# EAGLE board adc module (EAGLE 6.5.0)
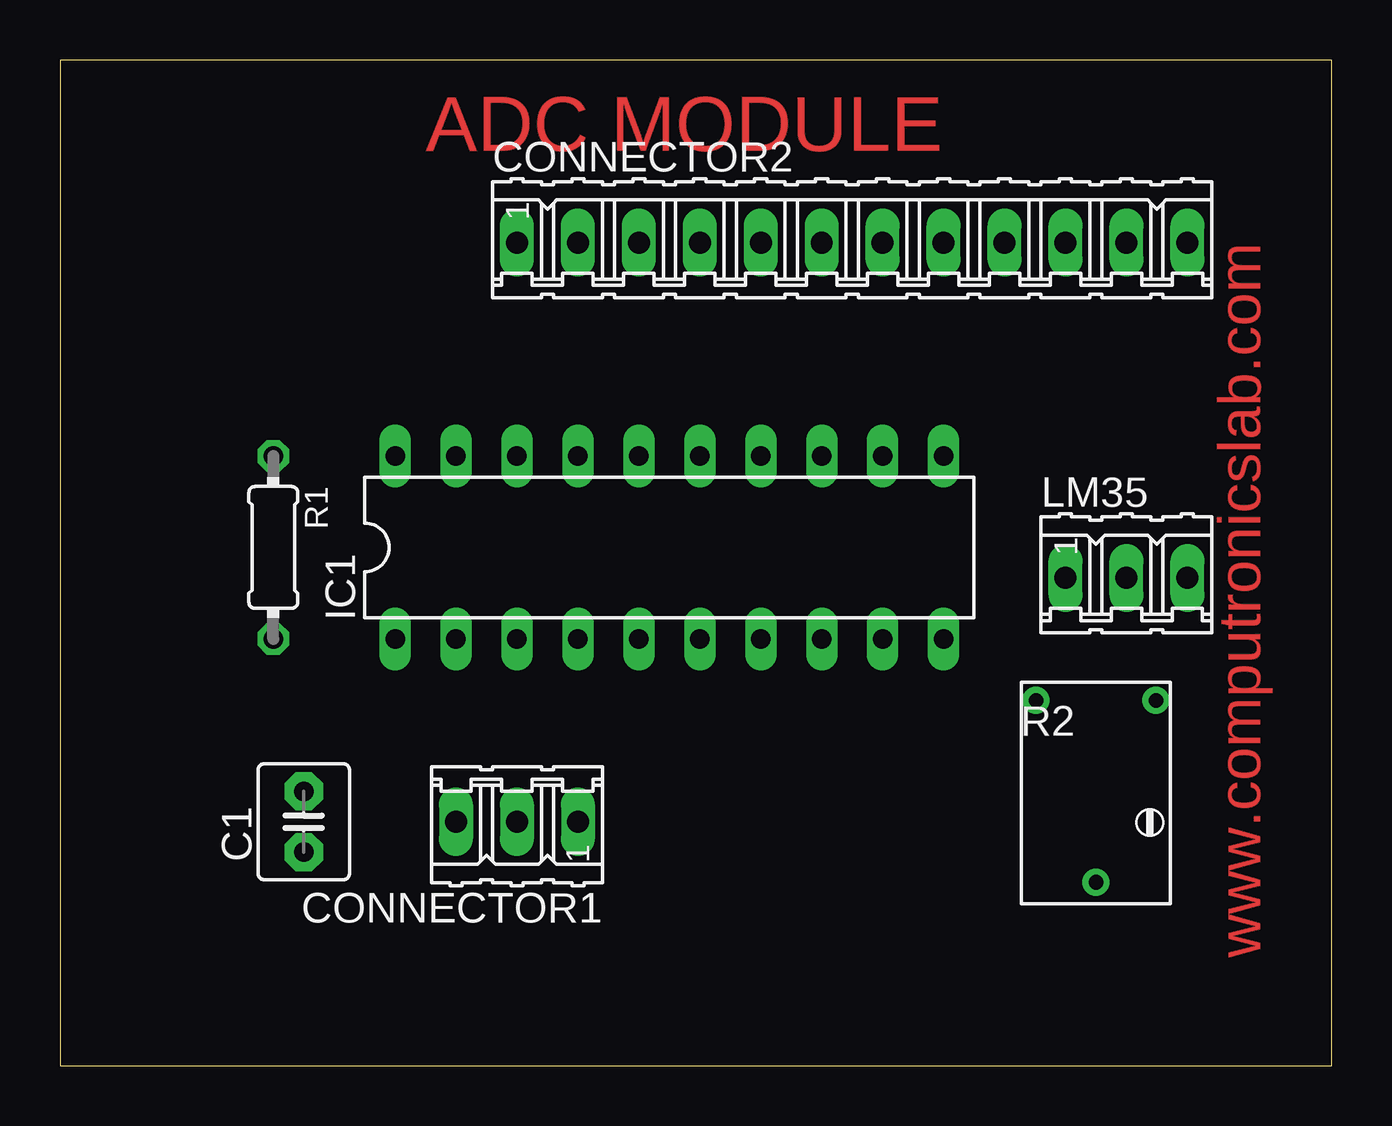
[diagram p0: board, top side]
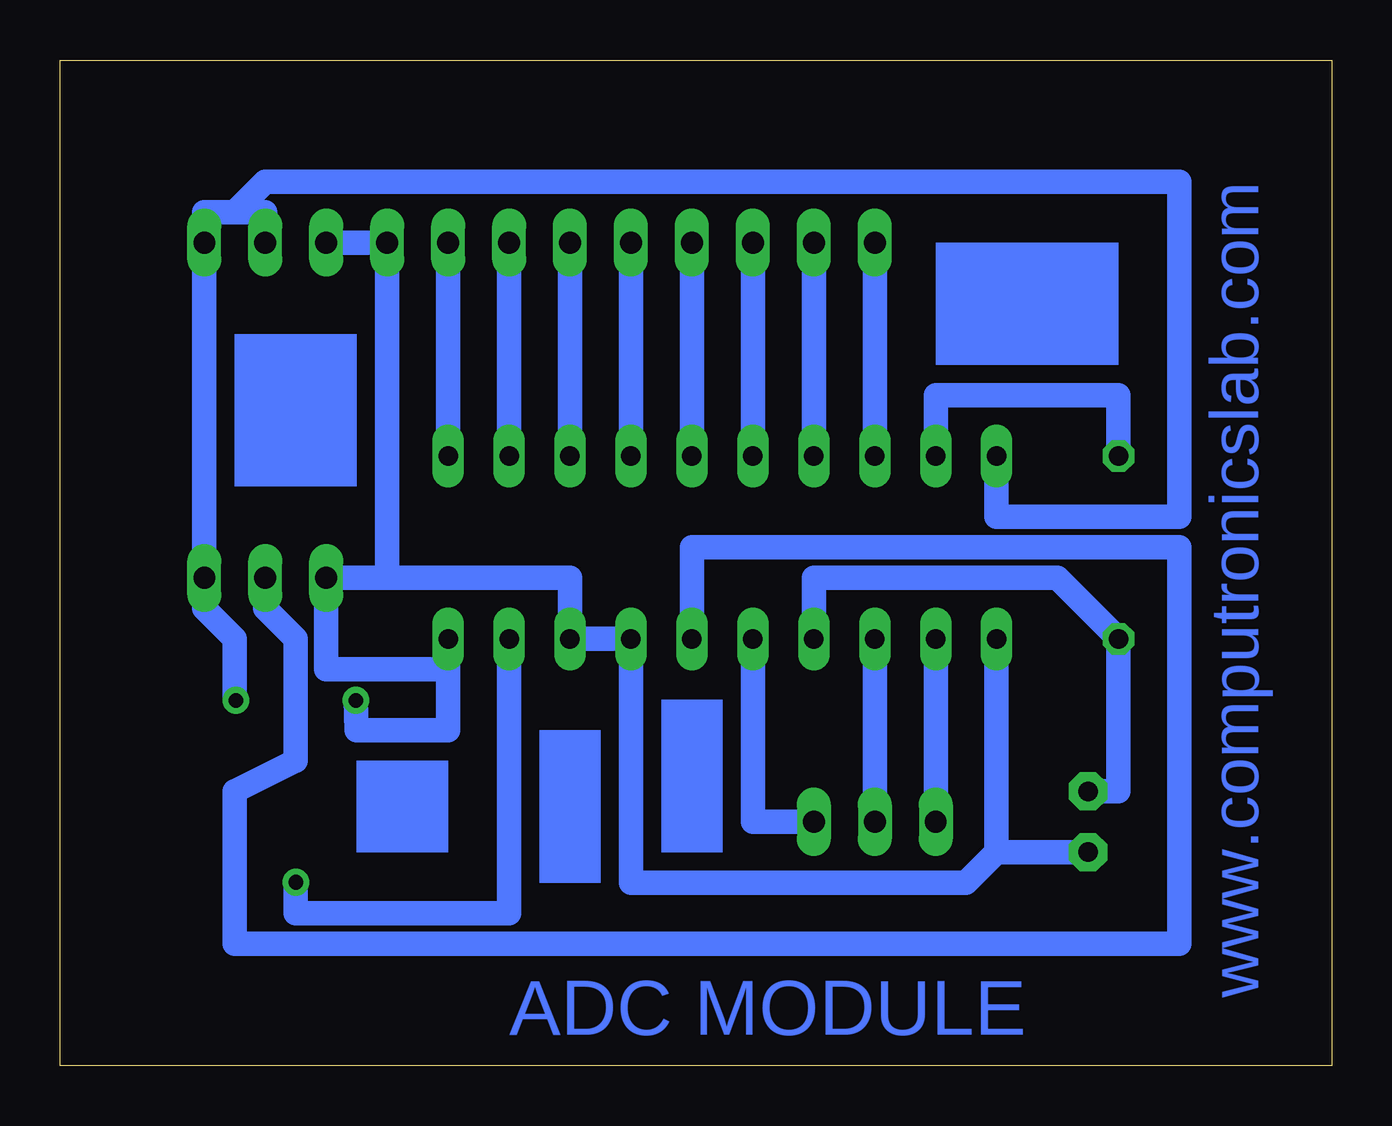
[diagram p1: board, bottom side, seen from below]

Size 53.01 x 41.9 mm. Coordinates in mm from the lower left corner, seen from the top.
Outline: 0,0 53.01,0 53.01,41.9 0,41.9 0,0
Copper layers (1*16): Top 0.035mm / dielectric 1.5mm / Bottom 0.035mm
Design rules "default *": minimum track width 40mil, minimum drill 24mil, track to track 8mil, track to pad 8mil, pad to pad 8mil, via to via 8mil, smd to smd 8mil, copper to edge 40mil, drill to drill 8mil, minimum pad ring 10mil, minimum via ring 8mil, stop-mask expansion 4mil, vias tented up to drill 0mil, thermal gap 10mil

## Footprints (pad centres in the part's own frame; a part is rotated, then mirrored left to right if it is on the bottom)
C2.5-4 = drill 0.813 pad 1.6 octagon: 1 -1.27,0; 2 1.27,0
03P = drill 0.914 long: 1 -2.54,0; 2 0,0; 3 2.54,0
12P = drill 0.914 long: 1 -13.97,0; 2 -11.43,0; 3 -8.89,0; 4 -6.35,0; 5 -3.81,0; 6 -1.27,0; 7 1.27,0; 8 3.81,0; 9 6.35,0; 10 8.89,0; 11 11.43,0; 12 13.97,0
DIL20 = drill 0.813 long: 1 -11.43,-3.81; 2 -8.89,-3.81; 3 -6.35,-3.81; 4 -3.81,-3.81; 5 -1.27,-3.81; 6 1.27,-3.81; 7 3.81,-3.81; 8 6.35,-3.81; 9 8.89,-3.81; 10 11.43,-3.81; 11 11.43,3.81; 12 8.89,3.81; 13 6.35,3.81; 14 3.81,3.81; 15 1.27,3.81; 16 -1.27,3.81; 17 -3.81,3.81; 18 -6.35,3.81; 19 -8.89,3.81; 20 -11.43,3.81
0204/7 = drill 0.813 octagon: 1 -3.81,0; 2 3.81,0
RTRIM74W = drill 0.61: 1 -3.79,-2.5; 2 3.79,0; 3 -3.79,2.5

## Placement (x,y rotation side)
C1  150pf  [C2.5-4]  10.16,10.16 90 top
CONNECTOR1  3 pin  [03P]  19.05,10.16 180 top
CONNECTOR2  12 pin  [12P]  33.02,34.29 0 top
IC1  ADC0804  [DIL20]  25.4,21.59 0 top
LM35  3 pin  [03P]  44.45,20.32 0 top
R1  10K  [0204/7]  8.89,21.59 270 top
R2  10K  [RTRIM74W]  43.18,11.43 270 top

## Library data of the parts
C1 = capacitor-wima
CONNECTOR1 CONNECTOR2 LM35 = con-amp-quick; OC_FARNELL: unknown; OC_NEWARK: unknown
IC1 = maxim; MF: MAXIM; MPN: MAX333ACPP; OC_FARNELL: unknown; OC_NEWARK: 77C9354
R1 R2 = rcl

## Nets
N$1: CONNECTOR2.1 IC1.18
N$2: CONNECTOR2.2 IC1.17
N$3: CONNECTOR2.3 IC1.16
N$4: CONNECTOR2.4 IC1.15
N$5: CONNECTOR2.5 IC1.14
N$6: CONNECTOR2.6 IC1.13
N$7: CONNECTOR2.7 IC1.12
N$8: CONNECTOR2.8 IC1.11
N$9: IC1.19 R1.1
N$10: C1.2 IC1.4 R1.2
N$11: CONNECTOR1.3 IC1.2
N$12: CONNECTOR1.2 IC1.3
N$13: CONNECTOR1.1 IC1.5
N$15: C1.1 CONNECTOR2.9 CONNECTOR2.10 IC1.1 IC1.7 IC1.8 IC1.10 LM35.1 R2.1
N$16: IC1.6 LM35.2
N$17: IC1.9 R2.2
N$18: CONNECTOR2.11 CONNECTOR2.12 IC1.20 LM35.3 R2.3

## Tracks (layer width: path | path; a pad name or v marks a point on that pad's centre or on a via)
N$1
  Bottom 1.016: CONNECTOR2.1 IC1.18
N$2
  Bottom 1.016: CONNECTOR2.2 IC1.17
N$3
  Bottom 1.016: CONNECTOR2.3 IC1.16
N$4
  Bottom 1.016: CONNECTOR2.4 IC1.15
N$5
  Bottom 1.016: CONNECTOR2.5 IC1.14
N$6
  Bottom 1.016: CONNECTOR2.6 IC1.13
N$7
  Bottom 1.016: CONNECTOR2.7 IC1.12
N$8
  Bottom 1.016: CONNECTOR2.8 IC1.11
N$9
  Bottom 1.016: R1.1 8.89,26.67 8.89,27.94 11.43,27.94 15.24,27.94 16.51,27.94 16.51,26.67 IC1.19
N$10
  Bottom 1.016: C1.2 8.89,11.43 R1.2 11.43,20.32 21.59,20.32 IC1.4
N$11
  Bottom 1.016: CONNECTOR1.3 IC1.2
N$12
  Bottom 1.016: CONNECTOR1.2 IC1.3
N$13
  Bottom 1.016: IC1.5 24.13,10.16 CONNECTOR1.1
N$15
  Bottom 1.016: 13.97,8.89 IC1.1 | C1.1 13.97,8.89 | CONNECTOR2.10 CONNECTOR2.9 39.37,20.32 | IC1.10 36.83,16.51 | 36.83,16.51 36.83,13.97 40.64,13.97 R2.1 | 36.83,16.51 41.91,16.51 LM35.1 39.37,20.32 | 39.37,20.32 31.75,20.32 IC1.8 IC1.7 29.21,7.62 15.24,7.62 13.97,8.89
N$16
  Bottom 1.016: IC1.6 26.67,21.59 6.35,21.59 6.35,5.08 45.72,5.08 45.72,11.43 43.18,12.7 43.18,17.78 44.45,19.05 LM35.2
N$17
  Bottom 1.016: IC1.9 34.29,6.35 43.18,6.35 R2.2
N$18
  Bottom 1.016: R2.3 45.72,15.24 45.72,17.78 46.99,19.05 LM35.3 CONNECTOR2.12 46.99,35.56 45.72,35.56 | IC1.20 13.97,22.86 6.35,22.86 6.35,36.83 44.45,36.83 45.72,35.56 | 45.72,35.56 44.45,35.56 CONNECTOR2.11
(copper drawn outside any net)
  shapes: Bottom area x5

## Text on the board
Top: ADC MODULE | www.computronicslab.com
Bottom: www.computronicslab.com | ADC MODULE